# Altium PCB PCB_NB-IoT.PcbDoc
Units mil, origin at the board's own origin, x right, y up, seen from the top; angles counter-clockwise.
Board outline 1889.76 x 944.88 mil, 2 copper layers (Top Layer, Bottom Layer); 28 components, 27 nets, 158 pads, 36 vias.
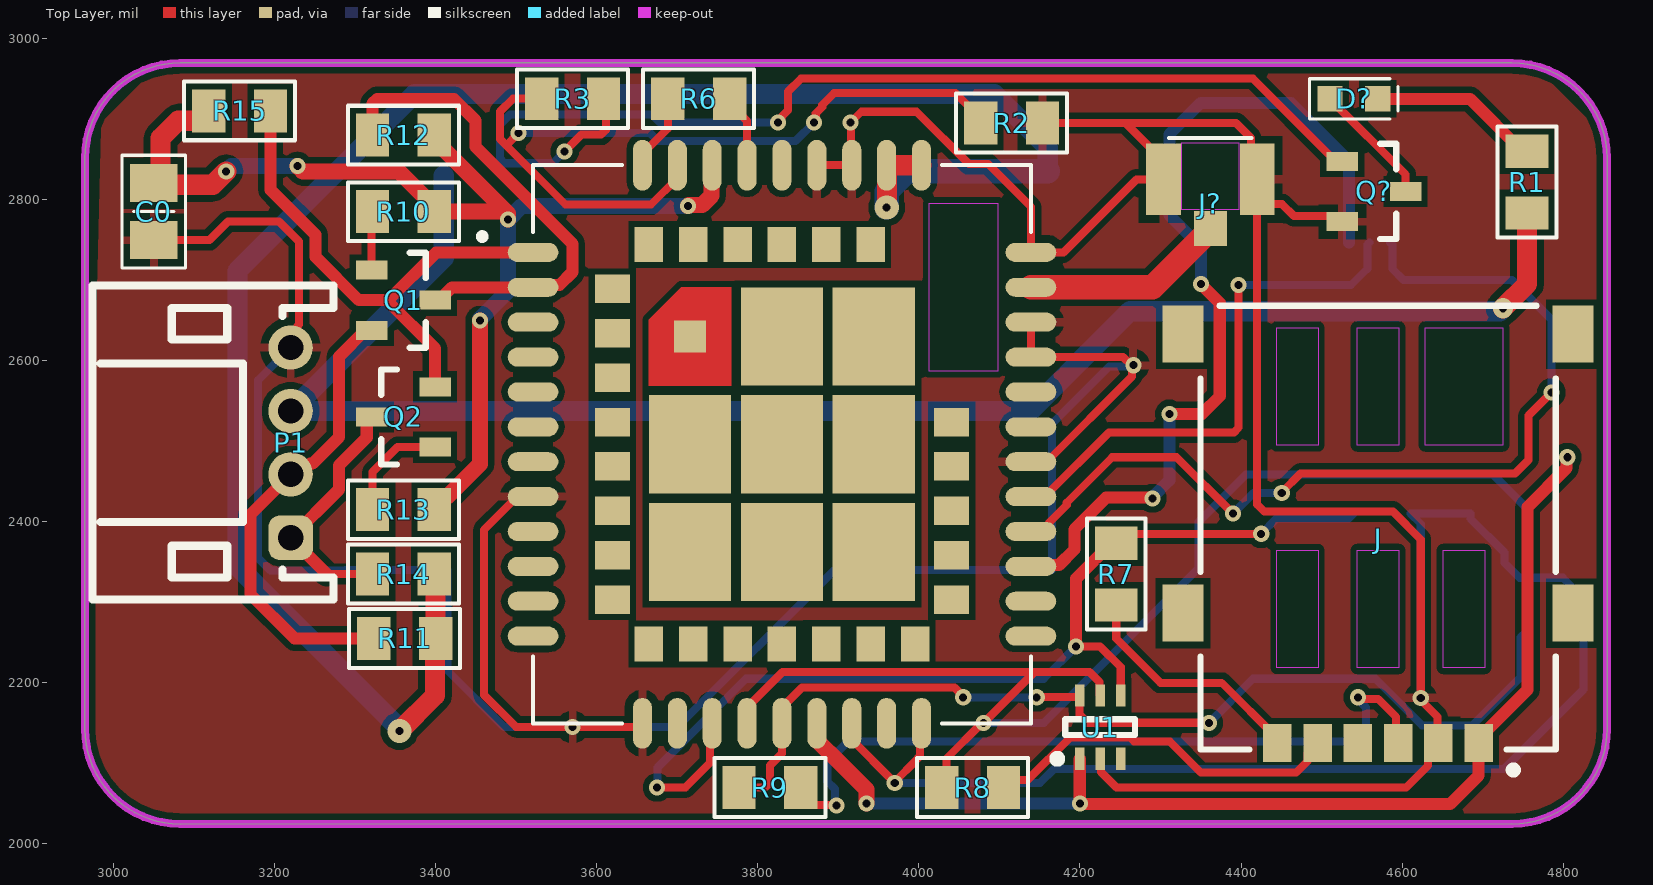
[diagram p0: Top Layer view]
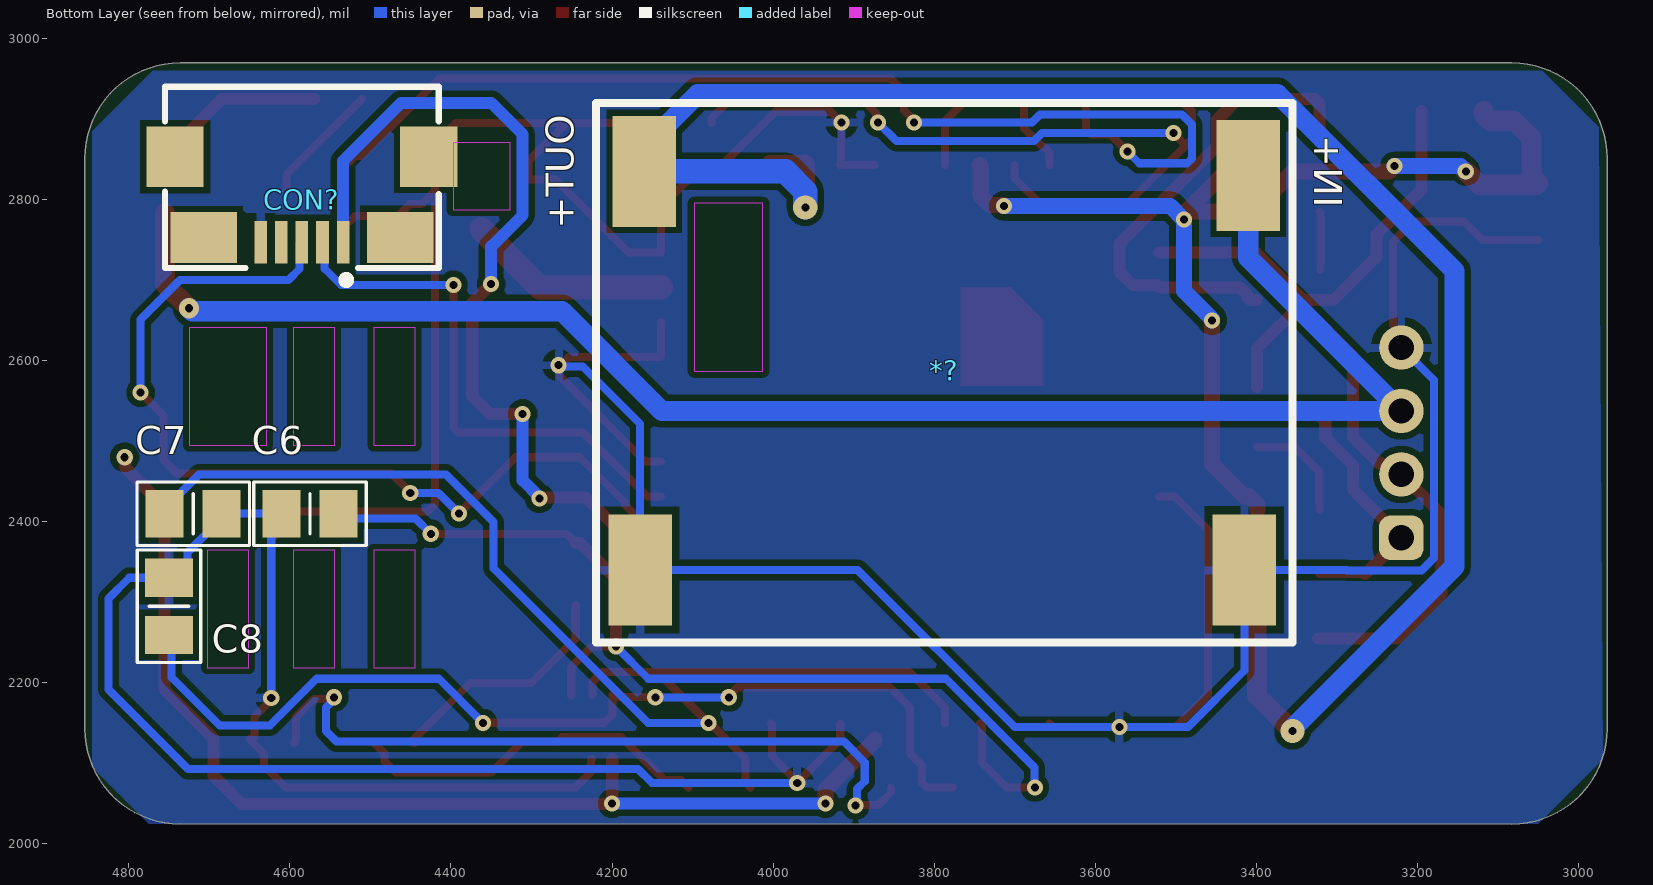
[diagram p1: Bottom Layer view, seen from below]
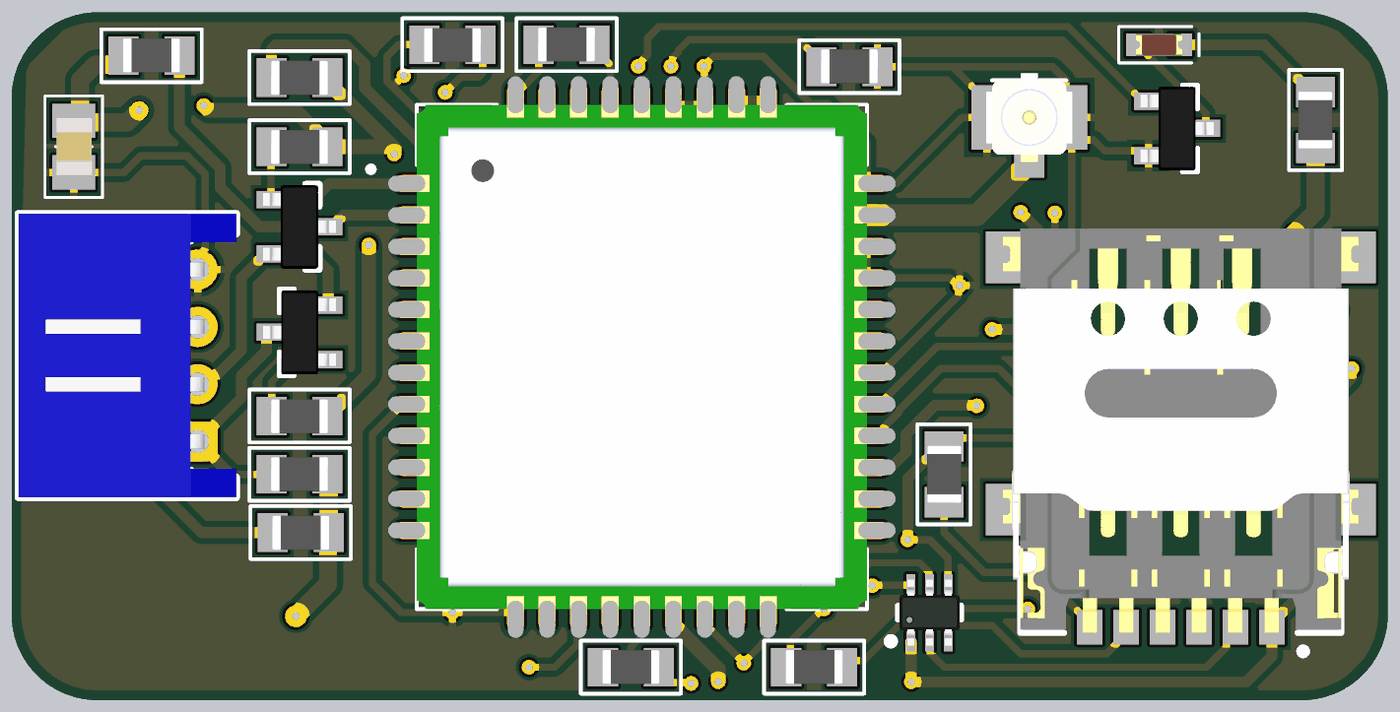
[diagram p2: 3D render of the assembled board from above, using the file's embedded part models]
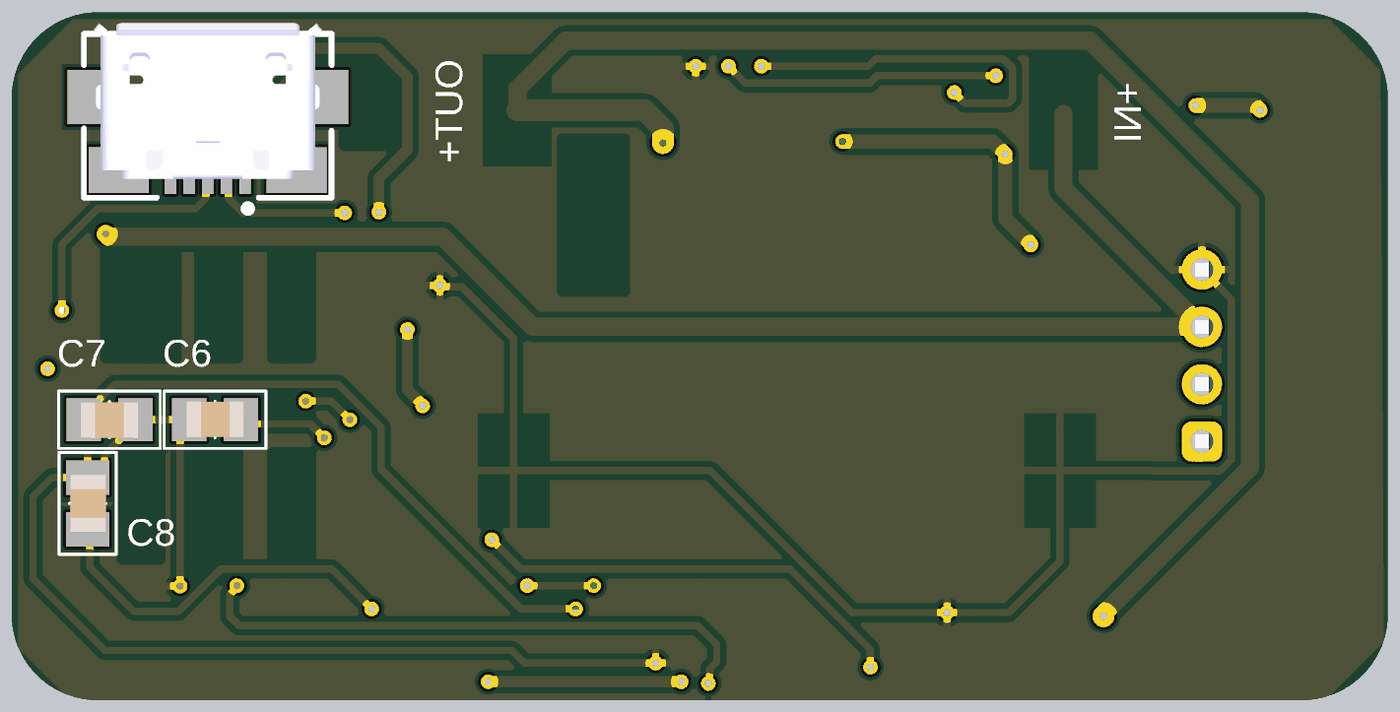
[diagram p3: 3D render of the assembled board from below, using the file's embedded part models]

## Layer stack, top to bottom
Top Solder: solder mask 0.4, Solder Resist, Dk 3.5
Top Layer: signal copper 1.4
Dielectric 1: dielectric 12.6, FR-4, Dk 4.8
Bottom Layer: signal copper 1.4
Bottom Solder: solder mask 0.4, Solder Resist, Dk 3.5

## Board outline
2964.61,2142.8 2964.61,2851.46 cw(c3082.72,2851.46) 3082.72,2969.57 4736.26,2969.57 cw(c4736.26,2851.46) 4854.37,2851.46 4854.37,2142.8 cw(c4736.26,2142.8) 4736.26,2024.69 3082.72,2024.68 cw(c3082.72,2142.8)

## Design rules (kind name [scope] priority, off if disabled: settings)
Clearance Clearance_1 [All] p1: gap=8 ignorepadtopadclearanceinfootprint=FALSE
Clearance [All] p2: gap=10 ignorepadtopadclearanceinfootprint=FALSE
PolygonConnect [All] p1: connectstyle=Relief reliefconductorwidth=10 reliefentries=4 polygonreliefangle="90 Angle" airgapwidth=10
RoutingVias [All] p1: holewidth=28 width=50 viastyle="Through Hole" minholewidth=28 minwidth=50 maxholewidth=28 maxwidth=50
SolderMaskExpansion [All] p1: expansion=4 istentingtop=FALSE
Width [InNet('NetC7_1') And OnLayer('Bottom Layer')] p1: maxlimit=50 minlimit=10 preferedwidth=10
30 further rules are at their usual default settings.

## Classes and differential pairs
component class Sch_NB-IoT: C0 C6 C7 C8 CON? D? J J? P1 Q1 Q2 Q? R1 R2 R3 R6 R7 R8 R9 R10 R11 R12 R13 R14 R15 U1

## Components (designator, comment, footprint, x,y, rotation, side; value= is the part's Value field where it differs from the comment)
*? "Component_1" PCBComponent_1 3300,3700 r0 bottom
C0 "22uF" "C 0805" 3050,2785 r90 top
C6 "33p" "C 0805" 4575,2410 r0 bottom
C7 "33p" "C 0805" 4720,2410 r180 bottom
C8 "33p" "C 0805" 4750,2295 r90 bottom
CON? "USB micro" CONN/USB/MICRO/RA 4585,2800 r90 bottom
D? "Led" "Led 0603 - red" 4540,2925 r180 top
J "SIM8060-6-0-14-00-A" GCT_SIM8060-6-0-14-00-A 4570,2392.72 r180 top
J? "U.FL-R-SMT(01)" HRS_U.FL-R-SMT(01) 4361.93,2825 r0 top
P1 "UART" HDR/Header/4/2mm/BOX/RA 3220,2498.11 r90 top
Q1 "Transistor NPN" SOT-23 3360,2675 r0 top
Q2 "Transistor NPN" SOT-23 3360,2530 r180 top
Q? "Transistor NPN" SOT-23 4565,2810 r0 top
R1 "1k" "R 0805" 4755,2821.61 r270 top
R2 "10k" "R 0805" 4115,2895 r180 top
R3 "1k" "R 0805" 3570,2925 r0 top
R6 "0" "R 0805" 3726.61,2925 r180 top
R7 "22" "R 0805" 4245,2335 r90 top
R8 "22" "R 0805" 4066.61,2070 r180 top
R9 "22" "R 0805" 3815,2070 r180 top
R10 "4.7k" "R 0805" 3360,2785 r0 top
R11 "47k" "R 0805" 3361.61,2255 r0 top
R12 "4.7k" "R 0805" 3360,2880 r0 top
R13 "4.7k" "R 0805" 3360,2415 r0 top
R14 "4.7k" "R 0805" 3360,2335 r180 top
R15 "47k" "R 0805" 3156.61,2910 r180 top
U1 "SMF05C" SOT-363-6 4225,2145 r90 top
? "SIM7080G" XCVR_SIM7080G 3830,2496.14 r0 top

## Footprints (in the part's own frame and the unit in brackets; to place one, negate y for a bottom-side part, rotate by r counter-clockwise, add the part's x,y. Pads: shape width x height; smd on the part's side, far side on the other; paste and mask are expansions set on the pad)
"C 0805" [mm] "Chip Capacitor, 2-Leads, Body 2.0x1.3mm, IPC Medium Density"
  rect 1.2x1.5 smd: 1(-0.9,0) 2(0.9,0)
  silkscreen extent -1.78,-1 1.78,1, body extent -1,-0.64 1,0.61, height 0.6
CONN/USB/MICRO/RA [mm]
  rect 1.35x0.4 smd: 1(-1.35,-1.3) 2(-1.35,-0.65) 3(-1.35,0) 4(-1.35,0.65) 5(-1.35,1.3)
  rect 1.6x2.1 smd: 6(-1.196,3.1) 8(-1.2,-3.1)
  rect 1.9x1.8 smd: 7(1.35,4) 9(1.35,-4)
  silkscreen extent -2.66,-4.32 3.56,4.32, body extent -1.5,-3.99 3.93,3.99, height 2.74
GCT_SIM8060-6-0-14-00-A [mm]
  rect 0.9x1.2 smd: C1(-3.175,6.8) C2(-0.635,6.8) C3(1.905,6.8) C5(-1.905,6.8) C6(0.635,6.8) C7(3.175,6.8)
  rect 1.3x1.8 smd: S1(-6.15,2.7) S2(6.15,2.7) S3(6.15,-6.1) S4(-6.15,-6.1)
  Keep-Out Layer region: 3.19,-6.3 1.89,-6.3 1.89,-2.6 3.19,-2.6
  Keep-Out Layer region: 0.65,-6.3 -0.65,-6.3 -0.65,-2.6 0.65,-2.6
  Keep-Out Layer region: -1.49,-6.3 -3.93,-6.3 -3.93,-2.6 -1.49,-2.6
  Keep-Out Layer region: 3.19,0.72 1.89,0.72 1.89,4.42 3.19,4.42
  Keep-Out Layer region: 0.65,0.72 -0.65,0.72 -0.65,4.42 0.65,4.42
  Keep-Out Layer region: -2.06,0.72 -3.36,0.72 -3.36,4.42 -2.06,4.42
  Keep-Out Layer region: 3.19,-6.3 1.89,-6.3 1.89,-2.6 3.19,-2.6
  Keep-Out Layer region: 0.65,-6.3 -0.65,-6.3 -0.65,-2.6 0.65,-2.6
  Keep-Out Layer region: -1.49,-6.3 -3.93,-6.3 -3.93,-2.6 -1.49,-2.6
  Keep-Out Layer region: 3.19,0.72 1.89,0.72 1.89,4.42 3.19,4.42
  Keep-Out Layer region: 0.65,0.72 -0.65,0.72 -0.65,4.42 0.65,4.42
  Keep-Out Layer region: -2.06,0.72 -3.36,0.72 -3.36,4.42 -2.06,4.42
  silkscreen extent -5.6,-7 5.6,7.76, body extent -6.2,-7.11 6.2,6.99, height 1.4
HDR/Header/4/2mm/BOX/RA [mm]
  rrect50% 1.4x1.4 hole 0.8: 1(-3,0)
  round 1.4 hole 0.8: 2(-1,0) 3(1,0) 4(3,0)
  silkscreen extent -4.95,-1.35 4.95,6.25, body extent -4.95,-1.35 4.95,6.25, height 4.8
HRS_U.FL-R-SMT(01) [mm]
  rect 1.1x2.25 smd: 1(-1.475,0) 2(1.475,0)
  rect 1.05x1.1 smd: 3(0,-1.55)
  Keep-Out Layer region: 0.9,-0.963 -0.903,-0.963 -0.903,1.15 0.9,1.15
  silkscreen extent -1.3,1.3 1.3,1.3, body extent -1.5,-1.55 1.5,1.55, height 1.25
"Led 0603 - red" [mm] "Led SMD 0603"
  rect 0.8x0.8 smd: 1(-0.75,0) 2(0.75,0)
  silkscreen extent -1.4,-0.64 1.4,0.64, body extent -0.81,-0.4 0.81,0.4, height 0.6
PCBComponent_1 [mil]
  rect 78.74x137.8 smd: 1(110,870) 2(115,1360) 2(865,1360) 3(860,865)
  silkscreen extent 55,780 920,1450
"R 0805" [mm] "Chip Resistor, 2-Leads, Body 2.0x1.3mm, IPC Medium Density"
  rect 1.05x1.35 smd: 1(-0.975,0) 2(0.975,0)
  silkscreen extent -1.75,-0.92 1.75,0.92, body extent -1,-0.61 1,0.59, height 0.5
SOT-23 [mm] "SOT23, 3-Leads, Body 3.0x2.5mm (max), Pitch 0.95mm, IPC Medium Density"
  rect 1x0.6 smd: 1(-1,0.95) 2(-1,-0.95) 3(1,0)
  silkscreen extent 0.2,-1.5 0.7,1.5, body extent -1.28,-1.46 1.27,1.46, height 0.95
SOT-363-6 [mm] "SOT363 (SC-88, SC-70-6), 6-Leads, Body 2.2x2.2mm (max), Pitch 0.65mm, IPC Medium Density"
  rect 0.7x0.3 smd: 1(-1,0.65) 2(-1,0) 3(-1,-0.65) 4(1,-0.65) 5(1,0) 6(1,0.65)
  silkscreen extent -1.12,-1.1 0.25,1.47, body extent -1.15,-1.05 1.15,1.05, height 1
XCVR_SIM7080G [mm]
  oval 1.6x0.6 smd paste-2: 1(-7.85,6.05) 2(-7.85,4.95) 3(-7.85,3.85) 4(-7.85,2.75) 5(-7.85,1.65) 6(-7.85,0.55) 7(-7.85,-0.55) 8(-7.85,-1.65) 9(-7.85,-2.75) 10(-7.85,-3.85) 11(-7.85,-4.95) 12(-7.85,-6.05) 22(7.85,-6.05) 23(7.85,-4.95) 24(7.85,-3.85) 25(7.85,-2.75) 26(7.85,-1.65) 27(7.85,-0.55) 28(7.85,0.55) 29(7.85,1.65) 30(7.85,2.75) 31(7.85,3.85) 32(7.85,4.95) 33(7.85,6.05)
  oval 0.6x1.6 smd paste-2: 13(-4.4,-8.8) 14(-3.3,-8.8) 15(-2.2,-8.8) 16(-1.1,-8.8) 17(0,-8.8) 18(1.1,-8.8) 19(2.2,-8.8) 20(3.3,-8.8) 21(4.4,-8.8) 34(4.4,8.8) 35(3.3,8.8) 36(2.2,8.8) 37(1.1,8.8) 38(0,8.8) 39(-1.1,8.8) 40(-2.2,8.8) 41(-3.3,8.8) 42(-4.4,8.8)
  rect 1.1x0.9 smd paste-2: 43(-5.35,4.9) 44(-5.35,3.5) 45(-5.35,2.1) 46(-5.35,0.7) 47(-5.35,-0.7) 48(-5.35,-2.1) 49(-5.35,-3.5) 50(-5.35,-4.9) 58(5.35,-4.9) 59(5.35,-3.5) 60(5.35,-2.1) 61(5.35,-0.7) 62(5.35,0.7)
  rect 0.9x1.1 smd paste-2: 51(-4.2,-6.3) 52(-2.8,-6.3) 53(-1.4,-6.3) 54(0,-6.3) 55(1.4,-6.3) 56(2.8,-6.3) 57(4.2,-6.3) 63(2.8,6.3) 64(1.4,6.3) 65(0,6.3) 66(-1.4,6.3) 67(-2.8,6.3) 68(-4.2,6.3)
  rect 1x1 smd paste-1 mask+0: 69(-2.9,3.4)
  rect 2.6x3.1 smd paste-3: 70(-2.9,0) 71(-2.9,-3.4) 72(0,-3.4) 73(2.9,-3.4) 74(2.9,0) 75(2.9,3.4) 76(0,3.4) 77(0,0)
  Top Layer region: -1.6,1.85 -4.2,1.85 -4.2,3.92 -3.17,4.95 -1.6,4.95
  Keep-Out Layer region: 6.8,2.3 4.65,2.3 4.65,7.6 6.8,7.6
  silkscreen extent -9.55,-8.8 7.85,8.8, body extent -7.85,-8.8 7.85,8.8, height 2.6

## Part data
C0 C6 C7 C8: library part "Capacitor NP", "Capacitor non-pol"
CON?: library part "CON USB micro", "USB micro, 5 pins"
D?: "Typical LED"
J: "6 Position Card Connector NANO SIM Surface Mount, Right Angle Gold", PACKAGE="Package Analog Devices", Availability=Unavailable, MF="Global Connector Technology", MP=SIM8060-6-0-14-00-A, Price=None, SnapEDA_Link=https://www.snapeda.com/parts/SIM8060-6-0-14-00-A/Global%20Connector%20Technology/view-part/3214904/?ref=snap
J?: "U.FL (UMCC) Connector Receptacle, Male Pin 50Ohm Surface Mount Solder. RF Connectors / Coaxial Connectors", PACKAGE=None, Availability="In Stock", Check_prices=https://www.snapeda.com/parts/U.FL-R-SMT(01)/Hirose+Electric+Co+Ltd/view-part/?ref=eda, MF=Hirose, MP=U.FL-R-SMT(01), Price=None, Purchase-URL=https://pricing.snapeda.com/search/part/U.FL-R-SMT(01)/?ref=eda, SnapEDA_Link=https://www.snapeda.com/parts/U.FL-R-SMT(01)/Hirose+Electric+Co+Ltd/view-part/?ref=snap
P1: library part "Header 4", "Header, 4-Pin"
Q1 Q2 Q?: "NPN Bipolar Transistor"
R1 R2 R3 R6 R7 R8 R9 R10 R11 R12 R13 R14 R15: library part Resistor, "Resistor"
U1: "5-Line Transient Voltage Suppressor Array"
?: "Cellular, Navigation Galileo, GLONASS, GPS, GNSS, LTE Transceiver Module 1.559GHz ~ 1.576GHz, 1.575GHz ~ 1.576GHz, 1.574GHz ~ 1.606GHz, 1.598GHz ~ 1.563GHz Antenna Not Included Surface Mount", PACKAGE=Package, Check_prices=https://www.snapeda.com/parts/SIM7080G/SIMCom/view-part/?ref=eda, MF=SIMCom, MP=SIM7080G, SnapEDA_Link=https://www.snapeda.com/parts/SIM7080G/SIMCom/view-part/?ref=snap

## Via types
v1: diameter 20, hole 10, Top Layer to Bottom Layer, 33 vias
v2: diameter 30, hole 10, Top Layer to Bottom Layer, 2 vias
v3: diameter 25, hole 10, Top Layer to Bottom Layer, 1 vias

## Nets (pads, with @x,y where several pads share a name; then routed paths per layer and width w, separated by ;. In a path a pad name is that pad's centre, name@x,y a point inside that pad or via, vN(x,y) a via of type N, cw(c..) or ccw(c..) an arc to the next point about the centre after c; other vN are vias at no path point)
1.8V: ?.40 C0.2 R10.2 R12.2 R13.2 R15.2 | length 1451.1
  Top Layer w20: v1(3228.43,2841.57) 3235,2835 3354.29,2835 3398.39,2790.91 R10.2 3480,2785 ; R13.2 3398.39,2420.91 3409.05,2431.57 3414.96,2431.57 3455,2471.61 v1(3455,2650) ; R12.2 3398.39,2874.09 3490,2782.48 v1(3490,2775) ; v1(3713.49,2792.07) 3714.43,2793.02 3730.72,2793.02 3742.69,2804.99 3742.69,2841.91 ?.40
  Top Layer w25: R15.2 3118.23,2906.02 3110.06,2897.85 3080.1,2897.85 3058.58,2876.34 3058.58,2829.02 C0.2 3052.03,2818.4 3123.4,2818.4 v1(3140,2835)
  Bottom Layer w10: v1@3454.27,2650.73 v1(3455,2650)
  Bottom Layer w20: v1(3140,2835) 3146.57,2841.57 v1(3228.43,2841.57) ; v1(3455,2650) 3455,2651.46 3490,2686.46 v1(3490,2775) 3507.07,2792.07 v1(3713.49,2792.07)
3.3V: *?.3 ?.34 ?.35 R11.2 R14.1 | length 2348.4
  Top Layer w25: v2(3355,2140) 3355,2140.07 3399.16,2184.23 3399.16,2254.16 R11.2 3400,2333.39 R14.1 ; v2(3960,2790) 3960.61,2790.61 ?.35@3960.61,2843.22 ; ?.35@3961.59,2842.6 ?.34
  Bottom Layer w25: v2(3355,2140) 3355,2143.51 3153.94,2344.57 3153.94,2711.2 3373.74,2931 4093.53,2931 4160,2864.53 *?.3
  Bottom Layer w30: v2(3960,2790) 3960,2810 3985,2835 *?.3
+5: *?.1 P1.3 R1.2 | length 2059.7
  Top Layer w25: v3(4725,2665) 4755,2695 R1.2
  Bottom Layer w25: *?.1 3410,2727.48 P1.3 4138.13,2537.48 4261.9,2661.25 4721.25,2661.25 v3(4725,2665)
GND: *?.2 ?.8 ?.13 ?.19 ?.21 ?.27 ?.30 ?.31 ?.33 ?.36 ?.37 C0.1 C6.2 C7.2 C8.2 CON?.5 J.C5 J?.1 J?.2 P1.4 Q?.2 R2.1 U1.2 | length 7245.4
  Top Layer w10: C0.1 3119.11,2749.57 3142.21,2772.67 3205.42,2772.67 3230.36,2747.73 3230.36,2644.64 3228.63,2642.92 3228.63,2624.85 P1.4 ; ?.8 3501.26,2431.18 3460,2389.92 3460,2185 3500,2145 v1(3570,2145) 3652.09,2145 ?.13 ; ?.37 ?.36 3915.81,2843.41 3915.81,2894.69 v1(3915,2895.5) 3928.5,2909 3996.99,2909 4062.07,2843.92 4086.08,2843.92 4139.06,2790.95 ?.33 4179.33,2734.33 4270,2825 J?.1 4303.86,2847.64 4256.5,2895 ; ?.19 3916.61,2129.44 3967.41,2078.64 3967.41,2077.41 3970,2080 3970.45,2079.55 3972.49,2079.55 3994.56,2101.62 3994.56,2101.96 4001.57,2108.97 4001.57,2148.02 ?.21 ; ?.27 4158.74,2474.49 4264.44,2580.18 4264.44,2592.36 v1(4266.35,2594.28) 4263.64,2594.28 4253.51,2604.41 ?.30 ?.31 ; R2.1 4256.5,2895 ; U1.2 4225.91,2104.72 4225.91,2089.42 4245.32,2070 4605,2070 4632.28,2097.28 4632.28,2112.28 J.C5 4650,2130 4645.91,2130 4643.9,2132 4643.9,2157.76 v1@4623.04,2178.62 ; Q?.2 4518.82,2779.41 4465.59,2779.41 4450.8,2794.2 4436.65,2794.2 J?.2@4420,2810.86 ; v1(4623.04,2181.33) 4623.04,2378.04 4588.62,2412.47 4428.75,2412.47 4420,2421.22 J?.2@4420,2810.86 ; 4256.5,2895 4393.85,2895 4412.36,2876.49 4412.36,2832.64 J?.2 J?.2@4420,2810.86
  Bottom Layer w10: P1.4 3179.44,2575.66 3179.44,2355.13 3195.13,2339.44 3287.6,2339.44 3288.16,2340 3415,2340 3415,2215 3485,2145 v1(3570,2145) 3700,2145 3895,2340 4165,2340 4165,2521.21 4236.35,2592.56 4264.63,2592.56 v1(4266.35,2594.28) ; v1(3970,2075.5) 4150.07,2075.5 4167.57,2093 4726.34,2093 4825,2191.66 4825,2304.85 4799.42,2330.43 C8.2 4745.55,2330.43 4726.93,2349.06 4726.93,2361.73 4684.57,2404.09 C7.2 C6.2 4623.04,2397.39 v1(4623.04,2181.33)
"NB RX": P1.2 Q1.2 R11.1 | length 578.7
  Top Layer w15: Q1.2 3312.76,2637.6 3280,2604.84 3280,2505 3247.27,2472.27 3244.38,2472.27 3230.86,2458.74 P1.2 3170,2408.74 3170,2310 3225,2255 R11.1
"NB TX": P1.1 Q2.3 R14.2 | length 313
  Top Layer w10: 3265,2335 R14.2
  Top Layer w15: 3265,2335 P1.1 3280,2440 3280,2470 3314.48,2504.48 3314.48,2525.69 3318.79,2530 Q2.3
Net_15: ?.15 C6.1 R7.2 U1.4 | length 1298.9
  Top Layer w10: v1(3675,2070) 3710,2070 3740.78,2100.78 3740.78,2147.08 ?.15 ; v1(4195,2245) 4225,2245 4250.59,2219.41 U1.4 ; R7.2 4256.61,2385 v1(4425,2385)
  Top Layer w15: v1(4195,2245) 4195,2329.29 4239.09,2373.39 R7.2
  Bottom Layer w10: v1(3675,2070) 3675.46,2070.46 3675.46,2095 3785.46,2205 4155,2205 v1(4195,2245) ; v1(4425,2385) 4444.09,2404.09 4533.66,2404.09 C6.1
Net_16: ?.16 C7.1 R8.2 U1.5 | length 1550.2
  Top Layer w10: ?.16 3786.69,2169.37 3830.78,2213.46 4143.46,2213.46 ; R8.2 4034.05,2075.82 4034.05,2105.72 4078.33,2150 v1(4080,2150) 4143.46,2213.46 ; U1.5 4224.09,2185.28 4224.09,2201.08 4211.72,2213.46 4143.46,2213.46
  Bottom Layer w10: v1(4080,2150) 4155.1,2150 4347.23,2342.13 4347.23,2399.75 4405.94,2458.47 4712.87,2458.47 4755.43,2415.91 C7.1
Net_17: ?.17 C8.1 R9.2 U1.6 | length 1228.1
  Top Layer w10: R9.2 3809.14,2070 3815,2075.86 3815,2097.24 3829.92,2112.16 3829.92,2149.61 ?.17 ; ?.17 3830,2169.37 3854.81,2194.18 4044.14,2194.18 4055,2183.32 v1(4055,2182) ; v1@4146.83,2182.57 4198.5,2182.57 4199.16,2183.22 U1.6@4199.16,2184.62 ; U1.6 4199.41,2160.59 4209.59,2150.41 4359.59,2150.41 v1(4360,2150)
  Bottom Layer w10: v1(4055,2182) v1(4146.26,2182) ; v1(4360,2150) 4415,2205 4566.85,2205 4624.85,2147 4687,2147 4746.8,2206.8 4746.8,2256.37 C8.1
Net_24: ?.24 CON?.1 | length 1107.7
  Top Layer w15: ?.24 4140.7,2346.22 4173.86,2346.22 4192.93,2365.29 4192.93,2390.48 4232.41,2429.96 4289.04,2429.96 v1(4290,2429) ; v1(4310.93,2533.86) 4351.39,2533.86 4373.46,2555.93 4373.46,2671.54 v1(4350,2695)
  Bottom Layer w15: v1(4290,2429) 4290,2430.35 4310.93,2451.28 v1(4310.93,2533.86) ; v1(4350,2695) 4350,2741.53 4310.88,2780.66 4310.88,2880.88 4350,2920 4461.79,2920 4533.82,2847.97 CON?.1
Net_25: ?.25 CON?.3 | length 1160.9
  Top Layer w10: ?.25 4155.05,2387.87 4161.35,2394.17 4161.35,2398.7 4183.55,2420.9 4183.55,2423.55 4240,2480 4320,2480 v1(4390,2410) ; v1(4450.47,2435.47) 4450.47,2436.53 4473.95,2460 4740,2460 4756.75,2476.75 4756.75,2531.68 v1(4785.26,2560.2)
  Bottom Layer w10: v1(4390,2410) 4415.47,2435.47 v1(4450.47,2435.47) ; CON?.3 4587.72,2744.13 4587.72,2714.06 4601.78,2700 4736.18,2700 4785.26,2650.92 v1(4785.26,2560.2)
Net_26: ?.26 CON?.2 | length 672.6
  Top Layer w10: ?.26 4156.18,2431.18 4235.86,2510.86 4391.14,2510.86 4397,2516.72 v1(4397,2694.09)
  Bottom Layer w10: v1(4397,2694.09) 4536.72,2694.09 4556.69,2714.06 4556.69,2744.13 CON?.2
Net_39: ?.39 R6.1 | length 91.4
  Top Layer w10: R6.1 3765,2919.09 3786.69,2897.4 ?.39
Net_41: ?.41 R2.2 R3.1 | length 1025.9
  Top Layer w10: v1(3503,2882.5) 3487.75,2867.25 ; R3.1 3531.44,2925.18 3495.94,2925.18 3480,2909.23 3480,2875 3487.75,2867.25 ; ?.41 3700.08,2826.47 3667.16,2793.54 3561.46,2793.54 3487.75,2867.25 ; v1(3870,2895.5) 3871.91,2897.41 3871.91,2906.91 3880,2915 3880,2917.5 3894.5,2932 4045.52,2932 4076.61,2900.91 R2.2
  Bottom Layer w10: v1(3503,2882.5) 3666.07,2882.5 3676.07,2872.5 3847,2872.5 v1(3870,2895.5)
Net_42: ?.42 R6.2 | length 96.4
  Top Layer w10: ?.42 3656.77,2858.6 3663.06,2864.89 3664.77,2864.89 3688.23,2888.35 R6.2
NetD?_1: D?.1 R1.1 | length 212.4
  Top Layer w15: D?.1 4684.09,2925 4749.09,2860 R1.1
NetD?_2: D?.2 Q?.3 | length 153.9
  Top Layer w10: D?.2 4604.37,2831.1 Q?.3
NetJ_C2: J.C2 R9.1 | length 937.7
  Top Layer w10: R9.1 3853.39,2064.09 3869.06,2048.43 3896.98,2048.43 v1(3897.72,2047.68) ; v1(4545,2182) 4546.91,2180.09 4570.21,2180.09 4592.53,2157.76 4592.53,2127.47 J.C2
  Bottom Layer w10: v1(3897.72,2047.68) 3895.8,2049.6 3895.8,2068.06 3886.18,2077.69 3886.18,2101.18 3912,2127 4542,2127 4555,2140 4555,2169.29 4545,2179.29 v1(4545,2182)
NetJ_C3: J.C3 R8.1 | length 455
  Top Layer w10: R8.1 4114.1,2079.1 4134.81,2079.1 4188.12,2132.41 4261.88,2132.41 4267.29,2127 4311.5,2127 4350.13,2088.38 4468.1,2088.38 4482.28,2102.56 4482.28,2112.28 J.C3
NetJ_C7: J.C7 R7.1 | length 298.9
  Top Layer w10: R7.1 4245,2255 4300,2200 4375.91,2200 4445,2130.91 J.C7
NetQ1_1: Q1.1 R10.1 | length 73
  Top Layer w10: Q1.1 3320.63,2784.02 R10.1
NetQ2_1: Q2.1 R13.1 | length 137.2
  Top Layer w10: R13.1 3321.61,2461.61 3352.6,2492.6 Q2.1
NetQ?_1: Q?.1 R3.2 | length 1368.1
  Top Layer w10: v1(3560,2859.5) 3581.02,2880.52 3605.42,2880.52 3611.28,2886.37 3611.28,2922.1 R3.2 ; v1(3825,2895.5) 3825,2898.21 3837.61,2910.82 3837.61,2934.02 3853.59,2950 4415,2950 4510.79,2854.21 4518.82,2854.21 Q?.1
  Bottom Layer w10: v1(3560,2859.5) 3545.5,2845 3485.86,2845 3480,2850.86 3480,2893.13 3492.37,2905.5 3668.53,2905.5 3678.53,2895.5 v1(3825,2895.5)
RF: ?.32 J?.3 | length 253.7
  Top Layer w25: J?.3@4361.93,2762.99 J?.3
  Top Layer w30: ?.32 4289.96,2691.02 J?.3@4361.93,2762.99
SIM_VCC: ?.18 J.C1 U1.1 | length 1375.9
  Top Layer w15: U1.1 4199.7,2105.33 4199.7,2050.3 4200.5,2049.5 4659.5,2049.5 4695,2085 J.C1 4695,2130.91 4755.48,2191.39 4755.48,2418.13 4804.04,2466.69 4804.04,2479.04 v1(4805,2480)
  Top Layer w20: ?.18@3874,2129.31 3874,2128.33 3901.51,2100.82 3935,2067.33 v1(3935,2050)
  Bottom Layer w15: v1(3935,2050) v1(4200,2050)
U1RX: ?.2 Q1.3 R12.1 | length 605.4
  Top Layer w15: R12.1 3321.61,2919.14 3327.47,2925 3422.55,2925 3449.5,2898.05 3449.5,2865.5 3570,2745 3570,2710 3553.63,2693.63 3523.55,2693.63 ?.2 3420.34,2691.02 3411.56,2682.24 3411.56,2679.31 3407.24,2675 Q1.3
U1TX: ?.1 Q2.2 R15.1 | length 653
  Top Layer w15: R15.1 3195,2812.08 3250.86,2756.22 3250.86,2728.76 3304.62,2675 3341.3,2675 ; Q2.2 3399.37,2615.1 3341.3,2673.17 3341.3,2675 ; ?.1 3400.63,2734.33 3341.3,2675
pads on no net: ?.3 ?.4 ?.5 ?.6 ?.7 ?.9 ?.10 ?.11 ?.12 ?.14 ?.20 ?.22 ?.23 ?.28 ?.29 ?.38 ?.43 ?.44 ?.45 ?.46 ?.47 ?.48 ?.49 ?.50 ?.51 ?.52 ?.53 ?.54 ?.55 ?.56 ?.57 ?.58 ?.59 ?.60 ?.61 ?.62 ?.63 ?.64 ?.65 ?.66 ?.67 ?.68 ?.69 ?.70 ?.71 ?.72 ?.73 ?.74 ?.75 ?.76 ?.77 CON?.4 CON?.6 CON?.7 CON?.8 CON?.9 J.C6 J.S1 J.S2 J.S3 J.S4 U1.3

## Polygon pours and split planes (outlines as drawn)
GND on Bottom Layer "GND_L02_P000" (solid, pour order 0): 2975,2890 3045,2960 4770,2960 4845,2885 4845,2095 4775,2025 3050,2025 2970,2105
GND on Top Layer "GND_L01_P001" (solid, pour order 1): 2985,2895 3055,2965 4765,2965 4850,2880 4845,2875 4845,2100 4840,2100 4765,2025 3045,2025 2965,2105

## Keep-outs
Top Layer:
  the board outline again, w10

## Silkscreen, mask and mechanical layers (free items; w line width, h text height)
Bottom Overlay:
  text "OUT+" at 4235.67,2905 h60 r270
  text "IN+" at 3340,2790 h60 r90

## Text inside footprints (layer, text, board x,y; h text height)
CON?: Mechanical 1 "PCB Edge" at 4430,2925 h9.84 r180